# Altium PCB SFCslaver.PcbDoc (part 2 of 6)
Units mm, origin at the board's own origin, x right, y up, seen from the top; angles counter-clockwise.
Board outline 149.66 x 75.74 mm, 2 copper layers (Top Layer, Bottom Layer); 284 components, 212 nets, 830 pads, 310 vias.
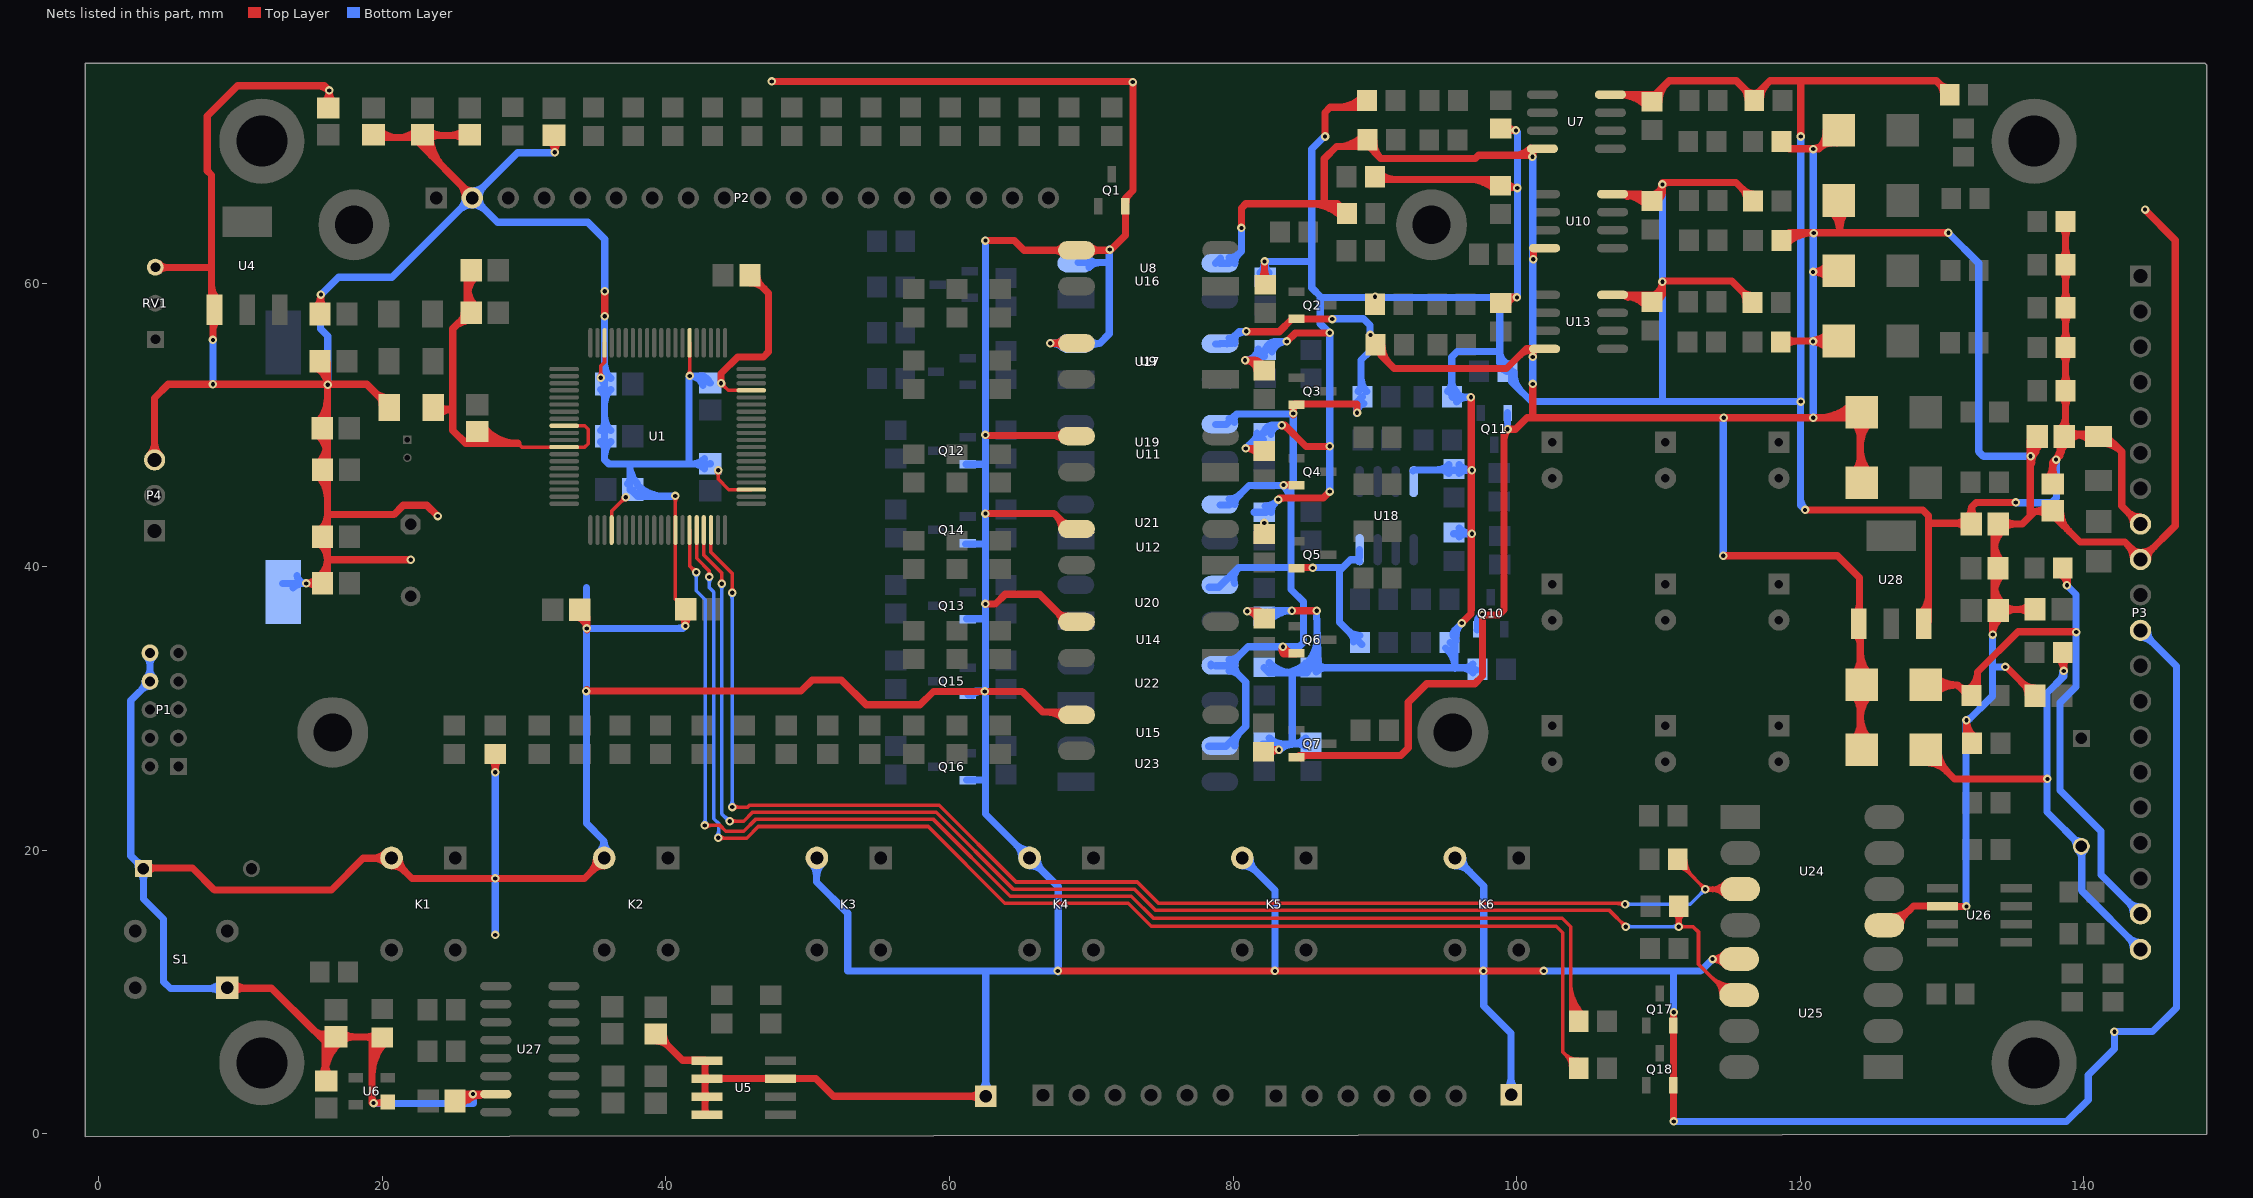
[diagram p2: the nets of this part, all layers, seen from the top]

## Via types
v1: diameter 0.6, hole 0.3, Top Layer to Bottom Layer, 310 vias

## Nets (pads, with @x,y where several pads share a name; then routed paths per layer and width w, separated by ;. In a path a pad name is that pad's centre, name@x,y a point inside that pad or via, vN(x,y) a via of type N, cw(c..) or ccw(c..) an arc to the next point about the centre after c; other vN are vias at no path point) (continued)
12V: C25.2 C28.2 C41.2 F1.2 P3.8 R1.2 R39.2 R44.2 R45.2 R50.1 R51.2 R52.1 R53.1 R59.2 R60.2 R65.2 R66.2 R71.1 R72.2 R73.2 R74.1 R81.2 R82.2 R87.2 R88.2 R93.1 R94.2 R95.1 R96.1 R107.2 R108.2 R112.2 R113.2 R118.1 R119.1 R120.2 R121.2 R126.2 R127.2 R130.2 R133.2 R134.1 R137.2 R138.1 U7.8 U10.8 U13.8 U18.8 U28.3 | length 495.6
  Top Layer w0.508: v1@80.823,54.559 v1(80.848,54.559) ; v1@80.848,54.513 cw(c80.848,53.114) R53.1@81.837,54.104 ; v1@80.975,36.855 v1(81.001,36.855) ; 81.406,54.535 cw(c80.7,53.829) R53.1@81.698,53.829 ; 81.408,54.559 cw(c81.408,53.757) R53.1@82.206,53.835 ; R95.1@81.598,36.855 cw(c81.598,36.24) R95.1@82.206,36.338 ; R53.1@81.7,53.786 ccw(c80.848,53.703) v1(80.848,54.559) ; R95.1@81.704,36.257 ccw(c81.001,36.143) v1(81.001,36.855) ; R73.2@81.783,47.885 ccw(c80.899,47.244) v1(80.899,48.336) 81.89,48.336 R73.2@82.169,48.057 ; R52.1@81.905,60.193 ccw(c81.146,60.952) 82.22,60.952 ; R96.1@81.991,27.051 82.017,27.076 v1(83.236,27.076) ccw(c83.236,26.299) R96.1@82.573,26.706 ; R53.1@82.122,54.274 cw(c82.072,55.25) 81.382,54.559 ; R95.1@82.194,36.328 82.194,36.525 81.864,36.855 v1(81.001,36.855) ; R53.1@82.194,53.829 82.112,53.829 81.382,54.559 ; R52.1@82.22,59.893 v1(82.22,61.519) ; 82.22,60.956 ccw(c83.299,60.956) R52.1@82.536,60.193 ; R96.1@82.509,27.255 ccw(c82.941,27.687) v1@82.941,27.076 ; 82.931,27.079 ccw(c83.027,27.438) v1@83.213,27.116 ; v1(83.185,44.729) 83.287,44.831 86.36,44.831 v1(86.817,45.288) ; v1@83.218,44.697 cw(c83.541,44.373) 83.541,44.831 ; v1@83.439,49.916 cw(c83.439,49.314) 83.864,49.74 ; v1(83.439,49.962) 83.642,49.962 85.141,48.463 v1@86.843,48.463 ; v1(83.795,55.88) 84.379,56.464 v1@86.745,56.464 ; v1(84.15,36.881) v1(85.903,36.881) ; v1(86.487,70.333) 86.487,72.034 86.843,72.39 88.849,72.39 R44.2@89.383,72.923 ; 87.328,72.39 ccw(c87.328,74.944) R44.2@89.134,73.138 ; 88.555,72.39 ccw(c88.555,73.717) R44.2@89.493,72.779 ; R65.2@90.094,67.488 90.272,67.31 98.527,67.31 R71.1@98.63,67.206 ; R65.2@90.317,67.122 cw(c90.77,66.67) 90.77,67.31 ; R65.2@90.317,67.753 ccw(c91.387,68.823) 91.387,67.31 ; v1@96.169,36.047 96.788,36.666 96.788,36.932 96.799,36.944 v1@96.799,51.968 ; 96.649,67.31 cw(c96.649,64.704) R71.1@98.491,66.547 ; 97.875,67.31 cw(c97.875,65.931) R71.1@98.851,66.906 ; R93.1@98.806,58.623 99.187,59.004 v1@100,59.004 ; R71.1@98.933,66.726 v1@100.025,66.726 ; R50.1@98.958,70.764 v1(99.949,70.764) cw(c99.949,71.509) R50.1@99.314,71.12 ; R71.1@99.222,66.547 cw(c99.654,66.115) 99.654,66.726 ; R50.1@99.249,70.571 cw(c99.717,70.104) v1@99.717,70.764 ; R71.1@99.272,67.118 ccw(c100.025,67.645) v1@100.025,66.726 ; R93.1@99.37,58.494 cw(c100,58.361) v1@100,59.004 ; v1(100.025,58.979) v1@100,59.004 ; v1(100.051,66.7) v1@100.025,66.726 ; U7.8@106.606,73.283 109.783,73.283 110.769,74.27 115.491,74.27 116.886,72.875 116.886,73.277 117.879,74.27 129.591,74.27 R1.2@130.581,73.279 ; U13.8@106.77,59.161 110.287,59.161 v1@110.287,60.089 ; U10.8@106.77,66.273 108.759,66.273 ; U7.8@107.207,73.283 cw(c107.207,70.49) R51.2@109.182,72.465 ; U13.8@107.222,59.161 cw(c107.222,56.382) R94.2@109.187,58.347 ; U10.8@107.222,66.273 cw(c107.222,63.494) R72.2@109.187,65.459 ; U13.8@107.61,59.184 ccw(c107.973,59.393) 107.865,58.988 ; U10.8@107.61,66.296 ccw(c107.973,66.505) 107.865,66.1 ; 108.434,73.283 cw(c108.434,71.716) R51.2@109.542,72.824 ; 108.448,59.161 cw(c108.448,57.608) R94.2@109.546,58.706 ; 108.448,66.273 cw(c108.448,64.72) R72.2@109.546,65.818 ; R72.2@109.311,66.177 cw(c109.103,66.617) 108.759,66.273 ; R94.2@109.5,59.096 ccw(c109.267,60.089) v1@110.287,60.089 ; R72.2@109.535,66.215 ccw(c109.401,67.09) v1@110.287,67.09 ; R72.2@109.552,65.774 109.881,66.103 109.944,66.103 110.287,66.446 v1@110.287,67.09 ; R72.2@109.577,65.765 109.56,65.782 109.249,65.782 108.759,66.273 ; R72.2@109.611,65.713 ccw(c109.492,66.499) 110.287,66.499 ; R94.2@109.616,58.602 ccw(c109.418,59.448) 110.287,59.448 ; R72.2@109.944,66.103 ccw(c109.211,66.836) v1@110.241,66.949 ; R51.2@110.044,72.78 cw(c111.887,72.78) 110.584,74.084 ; v1@110.319,66.922 cw(c110.726,66.515) 110.726,67.09 ; 115.861,59.456 cw(c115.082,58.677) R88.2@116.183,58.677 ; 115.885,59.432 ccw(c116.629,60.176) R88.2@116.629,59.123 ; 115.893,66.662 cw(c115.071,65.84) R66.2@116.234,65.84 ; 115.94,73.821 cw(c115.045,72.927) R45.2@116.31,72.927 ; 115.979,66.576 ccw(c116.68,67.277) R66.2@116.68,66.286 ; 116.128,73.633 ccw(c116.756,74.261) 116.756,73.373 ccw(c116.756,73.918) R45.2@117.142,73.533 ; R88.2@116.664,58.653 115.186,60.131 110.245,60.131 v1@110.287,60.089 ; R66.2@116.715,65.841 115.465,67.09 v1@110.287,67.09 ; R45.2@117.202,72.927 cw(c118.81,72.927) 117.673,74.064 ; v1@120.04,70.358 120.04,74.27 ; v1(120.345,43.993) 128.651,43.993 129.057,43.586 129.057,36.119 U28.3@128.88,35.941 ; U28.3@128.506,36.7 ccw(c127.177,38.029) 129.057,38.029 ; 129.184,43.053 C41.2@131.587,43.053 ; 129.759,74.101 ccw(c130.547,74.888) R1.2@130.547,73.775 ; 129.796,74.064 cw(c129.061,73.329) R1.2@130.101,73.329 ; 130.861,43.053 cw(c130.861,41.853) C41.2@131.709,42.701 ; 130.865,43.053 ccw(c130.865,44.248) C41.2@131.709,43.403 ; C41.2@131.623,43.053 C41.2@131.587,43.053 ; C41.2@131.732,43.424 ccw(c131.05,44.196) 132.08,44.196 ; C41.2@132.41,43.404 cw(c133.196,44.196) 132.08,44.196 ; v1@135.255,44.526 132.41,44.526 132.08,44.196 ; C28.2@137.42,46.183 ccw(c136.514,47.089) 137.795,47.089 ; C28.2@137.566,45.441 137.795,45.669 137.795,47.32 138.024,47.549 v1(138.049,47.549) 138.328,47.828 138.328,48.795 C25.2@138.737,49.203 ; 137.795,46.825 cw(c138.773,46.825) v1@138.082,47.516 ; 137.795,46.97 ccw(c138.908,46.97) C28.2@138.121,46.183 ; 137.795,47.207 cw(c138.094,47.207) v1@138.055,47.503 ; v1@138.016,47.581 ccw(c137.263,48.334) 138.328,48.334 ; C25.2@138.269,49.579 ccw(c137.179,50.669) 138.721,50.669 ; 138.328,47.796 cw(c139.354,47.796) C25.2@138.859,48.694 ; R82.2@138.405,52.039 cw(c137.644,51.278) 138.721,51.278 cw(c139.797,51.278) R82.2@139.036,52.039 ; R82.2@138.405,52.77 ccw(c137.644,53.531) 138.721,53.531 ccw(c139.797,53.531) R82.2@139.036,52.77 ; R81.2@138.405,55.087 cw(c137.644,54.326) 138.721,54.326 cw(c139.797,54.326) R81.2@139.036,55.087 ; R81.2@138.405,55.818 ccw(c137.644,56.579) 138.721,56.579 ccw(c139.797,56.579) R81.2@139.036,55.818 ; R60.2@138.405,57.881 cw(c137.644,57.12) 138.721,57.12 cw(c139.797,57.12) R60.2@139.036,57.881 ; R60.2@138.405,58.612 ccw(c137.644,59.373) 138.721,59.373 ccw(c139.797,59.373) R60.2@139.036,58.612 ; R59.2@138.405,60.929 cw(c137.644,60.168) 138.721,60.168 cw(c139.797,60.168) R59.2@139.036,60.929 ; R59.2@138.405,61.66 ccw(c137.644,62.421) 138.721,62.421 ccw(c139.797,62.421) R59.2@139.036,61.66 ; R39.2@138.405,63.977 cw(c137.644,63.216) 138.721,63.216 cw(c139.797,63.216) R39.2@139.036,63.977 ; C25.2@138.721,49.128 R82.2@138.721,52.404 R81.2@138.721,55.452 R60.2@138.721,58.246 R59.2@138.721,61.294 R39.2@138.721,64.342 ; 138.721,50.183 ccw(c139.574,50.183) 138.971,49.579 ccw(c139.519,50.128) 139.519,49.352 ; C25.2@138.735,49.352 141.427,49.352 142.672,48.108 ; C25.2@138.971,48.878 cw(c140.116,47.733) F1.2@140.116,49.352 ; C25.2@139.221,49.352 cw(c139.221,47.55) F1.2@140.495,48.824 ; 139.909,49.297 cw(c140.007,48.931) F1.2@140.37,49.037 ; 140.077,49.352 ccw(c140.077,49.945) F1.2@140.495,49.526 ; F1.2@141.255,48.679 cw(c141.291,46.727) 142.672,48.108 ; 143.058,43.886 ccw(c144,44.829) P3.8@144,43.496 ; 143.193,43.751 cw(c142.442,43) P3.8@143.504,43 ; P3.8@143.942,43.002 142.672,44.272 142.672,48.108 ; v1(80.848,54.559) 81.382,54.559 ; C41.2@131.587,43.053 132.08,43.546 132.08,44.196 ; v1@138.026,47.589 ccw(c137.619,48.294) 138.405,48.083 cw(c137.619,48.294) v1@138.026,47.589
  Bottom Layer w0.508: v1(80.899,48.336) 80.958,48.336 80.958,48.396 81.534,48.971 81.636,48.971 R126.2@82.22,49.555 ; v1@81.101,48.539 cw(c82.144,47.496) R126.2@82.144,48.971 ; 81.446,54.559 ccw(c81.446,55.406) R108.2@82.282,55.27 ; R130.2@81.494,43.829 82.31,43.829 83.21,44.729 v1(83.185,44.729) ; R126.2@81.5,48.937 ccw(c81.02,49.417) R126.2@81.698,49.417 ; R127.2@81.724,36.345 ccw(c81.001,36.087) v1(81.001,36.855) 81.712,36.855 82.169,36.398 82.169,36.678 R127.2@82.28,36.789 ; R108.2@81.778,55.224 cw(c80.985,55.125) 81.55,54.559 ; R108.2@81.78,55.352 cw(c80.848,55.504) v1(80.848,54.559) 81.55,54.559 ; R107.2@81.905,60.726 ccw(c81.146,61.485) v1@82.22,61.485 ; R107.2@82.093,60.096 82.22,60.096 v1(82.22,61.519) 85.547,61.519 ; R137.2@82.133,27.487 cw(c82.133,25.974) v1@83.203,27.044 ; R126.2@82.183,49.428 cw(c82.855,49.305) R126.2@82.855,49.987 ; R133.2@82.194,32.856 82.55,32.5 85.219,32.5 R134.1@85.256,32.537 ; R126.2@82.194,49.417 82.765,49.987 83.464,49.987 ccw(c83.464,49.193) R126.2@82.683,49.336 ; R127.2@82.199,36.537 cw(c82.987,35.807) 82.987,36.881 ; R133.2@82.201,32.859 ccw(c83.065,33.723) 83.065,32.5 ; R108.2@82.218,54.834 ccw(c82.213,53.896) 81.55,54.559 ; v1@82.22,61.489 ccw(c83.299,61.489) R107.2@82.536,60.726 ; R130.2@82.244,44.275 ccw(c82.244,45.509) v1@83.117,44.636 ; R108.2@82.262,55.3 cw(c83.079,55.015) 83.079,55.88 ; R108.2@82.271,55.28 81.55,54.559 ; R108.2@82.275,55.275 82.88,55.88 v1(83.795,55.88) ccw(c83.795,54.765) R108.2@82.742,55.133 ; R137.2@82.432,27.189 cw(c82.722,26.563) v1@83.21,27.051 ; R137.2@82.56,27.278 cw(c83.063,26.775) 83.063,27.487 ; R137.2@82.56,27.909 ccw(c83.579,28.928) 83.579,27.487 ; R133.2@82.56,33.218 ccw(c84.292,34.95) 84.292,32.5 ; R127.2@82.572,36.191 cw(c84.15,34.729) v1(84.15,36.881) ; R130.2@82.69,43.829 cw(c83.61,43.829) 82.96,44.479 ; R127.2@82.931,36.881 v1(84.15,36.881) ; v1(83.236,27.076) v1@83.21,27.051 ; v1@83.268,27.044 cw(c84.338,25.974) 84.338,27.487 ; 83.45,32.5 ccw(c83.45,34.877) R134.1@85.131,33.197 ; 84.112,27.487 ccw(c84.112,28.928) R138.1@85.131,27.909 ; 84.176,32.461 84.176,27.483 ; 84.628,27.487 cw(c84.628,26.775) 85.131,27.278 ccw(c84.638,26.785) 84.638,27.483 ; 84.677,32.5 ccw(c84.677,33.651) R134.1@85.49,32.837 ; R138.1@85.118,27.896 cw(c84.176,28.765) 84.176,27.483 ; R134.1@85.221,33.186 ccw(c83.298,34.992) 85.935,35.075 ; R134.1@85.592,32.839 ccw(c84.562,33.805) 85.973,33.85 ; R134.1@85.598,33.274 R134.1@86.004,32.868 ; R134.1@85.862,32.566 cw(c86.59,31.837) 86.59,32.868 ; R134.1@85.862,33.197 ccw(c86.656,33.991) 86.656,32.868 ; v1@85.877,36.881 R134.1@86.004,32.868 ; 86.157,58.953 86.157,57.125 86.817,56.464 v1(86.817,45.288) ; v1(86.487,70.333) 86.436,70.333 85.547,69.444 85.547,61.519 ; U18.8@92.686,46.74 92.758,46.812 R119.1@95.518,46.812 ; 94.308,46.812 ccw(c94.308,48.094) R119.1@95.215,47.188 ; 94.599,46.812 cw(c94.599,45.941) R119.1@95.215,46.557 ; R112.2@94.979,34.255 cw(c93.806,32.823) 95.656,32.823 ; R113.2@95.124,52.338 ccw(c94.385,53.077) 95.43,53.077 ; R112.2@95.3,34.648 cw(c94.685,33.896) 95.656,33.896 ; R113.2@95.43,52.095 95.43,54.79 95.809,55.169 98.808,55.169 ; 95.43,53.122 ccw(c96.538,53.122) R113.2@95.754,52.338 ; R113.2@95.439,51.973 95.469,51.943 v1(96.774,51.943) ; R119.1@95.529,46.787 v1(96.85,46.787) cw(c96.85,48.006) R119.1@95.957,47.176 ; R118.1@95.555,42.316 v1(96.85,42.316) cw(c96.85,43.536) R118.1@95.957,42.706 ; R112.2@95.617,34.969 cw(c95.962,35.229) 95.656,35.535 ; R112.2@95.704,34.754 cw(c97.217,34.939) v1(96.139,36.017) 95.656,35.535 ; R113.2@95.754,51.607 cw(c96.565,50.797) v1@96.565,51.943 ; R113.2@95.754,52.238 ccw(c96.466,52.95) 96.466,51.943 ; R118.1@95.946,42.087 cw(c96.5,41.532) 96.5,42.316 ; R119.1@95.946,46.557 cw(c96.5,46.002) 96.5,46.787 ; 96.046,32.868 cw(c96.046,31.615) R120.2@96.932,32.501 ; 96.295,32.868 ccw(c96.295,33.768) R120.2@96.932,33.131 ; R120.2@97.155,32.715 97.079,32.715 96.926,32.868 95.656,32.868 ; R121.2@98.808,54.475 ccw(c99.555,54.475) R121.2@99.33,53.763 ; R121.2@98.938,53.995 ccw(c98.379,54.23) 98.808,54.659 ; R121.2@99.483,54.247 cw(c99.774,55.169) 98.808,55.169 ; R121.2@99.795,53.722 ccw(c101.816,53.722) 100.387,52.293 ; v1@99.916,70.732 cw(c99.565,70.38) 100.062,70.38 ; v1@99.924,70.764 100.062,70.626 100.062,58.979 98.808,58.979 ; v1(100.025,58.979) 100,59.004 98.837,59.004 98.808,59.034 98.808,58.979 ; 110.287,51.638 110.287,66.827 110.312,66.853 110.312,67.056 110.287,67.031 v1(110.287,66.954) ; 120.015,44.901 ccw(c121.253,44.901) v1@120.378,44.025 ; v1(120.04,70.333) v1(120.04,51.638) ; v1(120.345,43.993) 120.015,44.323 120.015,51.613 v1(120.04,51.638) ; v1(135.204,44.526) 135.23,44.501 137.719,44.501 138.074,44.856 138.074,47.498 138.024,47.549 v1(138.049,47.549) ; v1@83.21,27.051 82.804,27.457 82.321,27.457 82.194,27.33 82.067,27.33 81.991,27.254 81.928,27.318 82.097,27.487 85.424,27.487 85.42,27.483 84.176,27.483 ; 85.547,61.519 85.547,59.665 86.233,58.979 98.808,58.979 ; R134.1@86.004,32.868 95.656,32.868 ; 95.656,32.868 95.656,35.535 ; 98.808,54.659 98.808,55.169 ; 98.808,54.659 99.644,53.823 99.644,53.035 101.041,51.638 v1(120.04,51.638) ; 98.808,55.169 98.808,58.979
  other v1: 82.194,43.078 86.817,48.489 86.817,56.49 90.018,59.03 110.287,60.096
AGND: C13.1 C17.1 C19.1 LR3.2 U1.9 U1.12 | length 39.6
  Top Layer w0.254: 29.566,48.692 29.829,48.429 34.281,48.429 34.519,48.666 34.519,49.682 34.272,49.929 U1.9@32.823,49.929
  Top Layer w0.508: LR3.2@23.597,51.206 23.699,51.105 24.968,51.105 ; LR3.2@23.948,51.357 ccw(c24.557,51.966) 24.557,51.105 ; LR3.2@23.959,50.667 cw(c24.968,49.723) 24.968,51.105 ; 24.968,51.257 24.968,56.769 25.984,57.785 C13.1@25.984,60.985 ; 25.061,56.861 cw(c26.279,55.643) C17.1@26.279,57.366 ; C17.1@25.586,57.387 ccw(c25.111,57.862) C17.1@25.783,57.862 ; C19.1@25.954,48.863 ccw(c26.319,49.166) 26.319,48.692 ; 25.984,58.951 cw(c28.187,58.951) C13.1@26.63,60.508 ; 25.984,59.871 ccw(c28.187,59.871) C17.1@26.63,58.313 ; C19.1@26.345,49.188 ccw(c27.401,50.064) 27.401,48.692 ; C19.1@26.736,49.512 ccw(c28.483,50.963) 28.483,48.692 ; C19.1@27.127,49.837 ccw(c29.565,51.861) 29.565,48.692 ; 29.566,48.692 25.883,48.692 24.968,49.606 24.968,51.105
CAN_LED_ERR: R160.1 U1.36 | length 100.7
  Top Layer w0.254: U1.36@42.173,42.579 42.173,40.581 43.066,39.688 ; v1@42.937,39.397 ccw(c42.673,39.687) 43.066,39.687 ; v1@43.066,39.256 43.066,39.688 ; 43.066,39.655 ccw(c43.44,39.655) v1@43.175,39.391 ; v1@43.713,20.93 43.806,20.837 45.693,20.837 46.523,21.668 58.495,21.668 63.905,16.258 72.617,16.258 74.24,14.635 102.79,14.635 103.251,14.173 103.251,5.762 R160.1@104.386,4.627 ; v1@43.81,20.756 cw(c44.005,20.562) 44.005,20.837 ; v1@43.81,21.001 ccw(c44.207,21.397) 44.207,20.837 ; 103.323,5.691 ccw(c104.386,6.754) R160.1@104.386,5.25 ; 103.444,5.57 cw(c102.551,4.677) R160.1@103.813,4.677 ; R160.1@103.756,5.257 ccw(c104.386,5.887) R160.1@104.386,4.996
  Bottom Layer w0.254: v1@42.931,39.146 cw(c42.596,38.811) 43.069,38.811 ; 43.069,38.89 cw(c43.431,38.89) v1@43.175,39.146 ; v1@43.069,39.252 43.069,38.515 43.383,38.202 43.383,22.225 43.739,21.869 43.739,20.93 v1(43.688,20.879) ; v1@43.566,21.001 ccw(c43.148,21.419) 43.739,21.419
  other v1: 43.053,39.268
CAN_LED_RUN: R158.1 U1.35 | length 103.4
  Top Layer w0.254: U1.35@41.673,42.579 41.673,40.039 v1@42.1,39.611 ; 41.8,39.912 ccw(c42.139,40.251) v1@42.139,39.772 ; 41.861,39.851 cw(c41.609,39.599) v1@41.966,39.599 ; v1(42.748,21.742) 43.815,21.742 44.221,21.336 45.486,21.336 46.317,22.167 58.87,22.167 64.28,16.757 72.824,16.757 74.387,15.193 103.221,15.193 103.81,14.605 103.81,8.484 R158.1@104.445,7.849 ; v1@42.871,21.62 cw(c43.166,21.325) 43.166,21.742 cw(c43.166,22.16) v1@42.871,21.865 ; 103.81,8.911 ccw(c105.322,8.911) R158.1@104.253,7.841 ; 103.81,9.524 ccw(c105.935,9.524) R158.1@104.432,8.021 ; 103.81,10.137 ccw(c106.549,10.137) R158.1@104.612,8.2 ; 103.81,10.75 ccw(c107.162,10.75) R158.1@104.792,8.38
  Bottom Layer w0.254: v1@42.016,39.476 cw(c41.721,39.181) 42.139,39.181 cw(c42.556,39.181) v1@42.261,39.476 ; v1(42.139,39.599) 42.139,38.303 42.774,37.668 42.774,21.844 42.875,21.742 v1(42.748,21.742) ; v1@42.626,21.865 ccw(c42.269,22.221) 42.774,22.221 ; 42.774,22.099 ccw(c43.105,22.099) v1@42.871,21.865
CAN_RD1: R139.2 U1.37 U25.6 | length 116.3
  Top Layer w0.254: U1.37@42.673,42.579 42.673,40.817 43.942,39.548 v1@43.942,38.71 ; v1@43.82,38.908 ccw(c43.524,39.203) 43.942,39.203 ccw(c44.36,39.203) v1@44.064,38.908 ; v1@44.399,22.123 44.475,22.047 45.491,22.047 46.11,22.666 59.077,22.666 64.487,17.256 73.03,17.256 74.538,15.748 106.553,15.748 v1(107.696,14.605) v1@107.709,14.592 ; v1@44.623,21.925 cw(c44.918,21.63) 44.918,22.047 cw(c44.918,22.465) v1@44.623,22.17 ; v1@107.523,14.605 ccw(c107.105,14.605) 107.401,14.9 ccw(c107.696,15.196) v1@107.696,14.778 ; R139.2@111.034,15.598 cw(c110.079,14.642) v1@111.43,14.642 ; R139.2@111.214,15.777 cw(c110.692,15.255) 111.43,15.255 ; v1@111.28,14.692 ccw(c110.89,14.917) 111.325,15.033 ; v1@111.307,14.727 ccw(c111.012,15.023) 111.43,15.023 ccw(c111.847,15.023) 111.552,14.727 ccw(c111.847,15.023) 111.847,14.605 ccw(c111.847,14.187) v1@111.552,14.483 ; 111.337,14.988 ccw(c111.709,15.088) v1@111.516,14.755 ; v1@111.343,14.755 ccw(c111.134,15.116) 111.538,15.008 ccw(c111.941,14.9) v1@111.58,14.691 ; 111.43,15.215 cw(c112.221,15.215) R139.2@111.664,15.776 ; R139.2@111.43,16.129 v1(111.43,14.605) ; R139.2@111.843,15.596 ccw(c112.825,14.605) v1(111.43,14.605) ; 113.681,11.109 ccw(c115.147,12.575) U25.6@115.147,10.502 ; 114.009,10.781 cw(c113.006,9.779) U25.6@114.424,9.779 ; 114.115,10.676 ccw(c115.147,11.708) U25.6@115.147,10.248 ; 114.442,10.348 cw(c113.874,9.779) U25.6@114.678,9.779 ; U25.6@115.799,9.677 115.113,9.677 112.827,11.963 112.827,14.224 112.446,14.605 v1(111.43,14.605)
  Bottom Layer w0.254: v1@43.82,38.663 cw(c43.524,38.368) 43.942,38.368 cw(c44.36,38.368) v1@44.064,38.663 ; v1(43.942,38.786) 43.942,22.555 44.386,22.111 v1@44.399,22.123 ; 44.119,22.378 ccw(c44.501,22.76) v1@44.501,22.22 ; 44.241,22.256 cw(c44.033,22.047) v1@44.328,22.047 ; v1(107.696,14.605) v1(111.43,14.605) ; v1@107.818,14.483 cw(c108.114,14.187) 108.114,14.605 cw(c108.114,15.023) v1@107.818,14.727 ; v1@111.307,14.483 ccw(c111.012,14.187) 111.012,14.605 ccw(c111.012,15.023) v1@111.307,14.727
  other v1: 44.501,22.047
CAN_TD1: R159.2 U1.38 U24.3 | length 112.3
  Top Layer w0.254: U1.38@43.173,42.579 43.173,41.023 44.679,39.517 v1@44.679,38.1 ; v1@44.556,38.273 ccw(c44.261,38.568) 44.679,38.568 ccw(c45.096,38.568) v1@44.801,38.273 ; v1@44.653,22.962 44.729,23.038 45.771,23.038 45.898,23.165 59.284,23.165 64.694,17.755 73.237,17.755 74.745,16.247 107.578,16.247 v1(107.645,16.18) ; v1@44.801,22.915 cw(c45.096,22.62) 45.096,23.038 cw(c45.096,23.455) v1@44.801,23.16 ; 107.065,16.247 cw(c107.065,15.6) v1@107.523,16.057 ; R159.2@111.354,19.279 111.887,18.745 111.887,18.669 v1(113.309,17.247) U24.3@115.773,17.247 ; R159.2@111.363,18.732 cw(c111.363,17.618) 112.15,18.406 ; R159.2@111.682,19.305 ccw(c112.722,19.305) 111.987,18.569 ; R159.2@111.936,19.305 ccw(c113.589,19.305) 112.42,18.136 ; v1@113.136,17.247 ccw(c112.719,17.247) 113.014,17.542 ccw(c113.309,17.837) v1@113.309,17.42 ; v1@113.396,17.097 cw(c113.68,16.609) 113.825,17.155 ; v1@113.396,17.396 ccw(c113.68,17.884) 113.825,17.339 ; v1@113.432,17.124 cw(c113.727,16.829) 113.727,17.247 cw(c113.727,17.664) v1@113.432,17.369 ; v1@113.459,17.16 cw(c113.693,17.024) 113.624,17.285 ; v1@113.459,17.334 ccw(c113.693,17.469) 113.624,17.208 ; U24.3@114.712,16.735 ccw(c113.478,15.501) 113.478,17.247 ccw(c113.478,18.992) U24.3@114.712,17.758 ; U24.3@114.892,16.915 ccw(c114.091,16.114) 114.091,17.247 ccw(c114.091,18.379) U24.3@114.892,17.578
  Bottom Layer w0.254: v1@44.556,23.16 ccw(c44.289,23.427) 44.667,23.427 ; v1@44.556,38.028 cw(c44.289,37.761) 44.667,37.761 ; 44.667,23.483 ccw(c45.124,23.483) v1@44.801,23.16 ; 44.667,37.705 cw(c45.124,37.705) v1@44.801,38.028 ; v1@44.679,22.962 44.667,22.973 44.667,38.139 v1(44.679,38.151) ; v1(107.645,16.18) 112.243,16.18 v1(113.309,17.247) ; v1@107.768,16.057 cw(c108.063,15.762) 108.063,16.18 cw(c108.063,16.597) v1@107.768,16.302 ; v1@113.136,17.247 cw(c112.719,17.247) 113.014,16.951 cw(c113.309,16.656) v1@113.309,17.074
  other v1: 44.679,23.038
CANH_PORT1: D19.2 P3.19 R146.1 R150.2 | length 50.6
  Top Layer w0.508: D19.2@128.795,31.653 128.799,31.648 131.089,31.648 ; D19.2@129.479,31.019 cw(c130.998,29.5) 130.998,31.648 ; D19.2@129.479,32.286 ccw(c131.019,33.826) 131.019,31.648 ; R150.2@131.834,31.34 ccw(c131.07,32.563) 132.512,32.563 ; R150.2@131.948,30.789 131.089,31.648 ; R150.2@131.97,31.396 cw(c131.757,32.316) 131.089,31.648 ; R150.2@132.103,30.909 ccw(c131.643,31.646) R150.2@132.512,31.646 ; R150.2@132.131,30.886 132.512,31.267 132.512,32.563 ; R146.1@138.333,39.447 cw(c137.978,38.666) v1@138.836,38.666 ; R146.1@138.532,39.853 138.532,39.7 138.836,39.395 138.836,38.71 v1(138.811,38.684) ; v1@139.497,35.408 135.357,35.408 132.512,32.563
  Bottom Layer w0.508: v1@138.811,38.659 139.446,38.024 139.446,31.521 138.328,30.404 138.328,24.232 141.224,21.336 141.224,18.263 P3.19@143.987,15.5 ; 143.13,16.356 ccw(c144,17.226) P3.19@144,15.996 ; 143.163,16.324 cw(c142.339,15.5) P3.19@143.504,15.5
  other v1: 139.471,35.382
CANL_PORT1: D20.2 J2.2 P3.20 R147.1 | length 44
  Top Layer w0.508: D20.2@128.803,27.051 128.854,27.051 130.886,25.019 v1@137.414,25.019 ; D20.2@128.845,26.185 cw(c128.845,24.072) 130.339,25.566 ; D20.2@129.741,27.081 ccw(c131.955,27.081) 130.39,25.516 ; R147.1@138.202,33.573 cw(c137.284,32.655) v1@138.582,32.655 ; v1@138.582,32.614 R147.1@138.582,34.011 ; 138.582,32.969 cw(c139.437,32.969) R147.1@138.833,33.573
  Bottom Layer w0.508: 138.234,31.91 ccw(c137.506,32.639) v1@138.536,32.639 ; v1@138.582,32.563 138.582,32.258 137.414,31.09 137.414,22.682 139.852,20.244 139.852,17.145 P3.20@143.997,13 ; J2.2@139.481,20.269 ccw(c138.646,20.269) 139.236,20.86 ccw(c139.827,21.451) J2.2@139.827,20.615 ; J2.2@139.582,20.025 cw(c138.93,19.373) 139.852,19.373 ; 139.852,19.495 cw(c140.601,19.495) J2.2@140.072,20.025 ; 143.149,13.849 ccw(c144,14.7) P3.20@144,13.496 ; 143.155,13.842 cw(c142.313,13) P3.20@143.504,13
  other v1: 137.439,25.019 138.582,32.639
GND: BT1.2 C1.2 C2.2 C3.2 C4.2 C5.1 C6.1 C7.1 C8.1 C9.1 C10.1 C11.1 C12.1 C14.1 C15.2 C16.1 C18.1 C20.1 C21.1 C22.2 C23.1 C24.2 C27.1 C38.1 GND1.1 GND2.1 J1.1 K1.2 K2.2 K3.2 K4.2 K5.2 K6.2 LR3.1 P1.8 P1.10 P2.2 P3.11 P4.3 Q1.2 Q12.2 Q13.2 Q14.2 Q15.2 Q16.2 Q17.2 Q18.2 R4.2 R155.2 RV1.3 S1.1 U1.24 U1.33 U1.43 U1.57 U1.66 U1.78 U4.1 U5.1 U5.2 U5.3 U5.4 U5.7 U6.1 U8.3 U9.3 U11.3 U12.3 U14.3 U15.3 U16.2 U17.2 U25.5 U27.15 | length 913.2
  Top Layer w0.254: v1@35.285,53.437 ccw(c34.99,53.732) 35.408,53.732 ccw(c35.825,53.732) v1@35.53,53.437 ; v1(35.408,53.315) 35.408,54.153 35.673,54.418 U1.78@35.673,55.779 ; U1.24@36.173,42.579 36.173,43.92 v1@37.16,44.907 ; 36.822,44.569 cw(c37.16,44.23) v1@37.16,44.709 ; 36.883,44.63 ccw(c36.631,44.882) v1@36.987,44.882 ; v1@40.543,44.861 cw(c40.23,44.548) 40.673,44.548 ; 40.673,44.583 cw(c41.066,44.583) v1@40.788,44.861 ; v1@40.673,44.925 40.673,37.712 C9.1@41.377,37.008 ; v1@41.559,53.564 ccw(c41.285,53.838) 41.673,53.838 ; v1@41.673,53.442 U1.66@41.673,55.779 ; 41.673,53.88 ccw(c42.12,53.88) v1@41.804,53.564 ; v1@43.566,46.664 cw(c43.27,46.369) 43.688,46.369 cw(c44.106,46.369) v1@43.81,46.664 ; v1@43.688,46.812 43.688,46.177 44.437,45.429 U1.43@46.023,45.429 ; v1@43.891,52.761 cw(c43.891,52.343) 44.187,52.638 cw(c44.482,52.934) v1@44.064,52.934 ; v1(43.891,52.934) 44.396,52.429 U1.57@46.023,52.429
  Top Layer w0.508: J1.1@3.15,18.745 6.604,18.745 8.153,17.196 16.408,17.196 18.644,19.431 20.669,19.431 22.091,18.009 34.265,18.009 K2.2@35.687,19.431 ; J1.1@3.394,18.45 cw(c4.108,17.736) 4.108,18.745 ; J1.1@3.394,18.939 ccw(c3.862,19.407) 3.862,18.745 ; P4.3@3.586,47.87 ccw(c2.74,48.717) 3.937,48.717 ccw(c5.134,48.717) P4.3@4.288,47.87 ; P4.3@3.937,47.574 3.937,51.892 4.902,52.857 v1(8.052,52.857) v1@16.129,52.857 ; RV1.3@3.962,61.087 7.925,61.087 ; RV1.3@4.232,60.868 cw(c4.762,60.338) 4.762,61.087 ; RV1.3@4.232,61.357 ccw(c4.884,62.009) 4.884,61.087 ; 7.95,59.872 ccw(c9.398,59.872) U4.1@8.374,58.848 ; U4.1@8.038,57.937 8.038,58.114 7.95,58.202 7.95,67.615 7.645,67.92 7.645,71.78 9.779,73.914 15.926,73.914 v1(16.256,73.584) ; v1(8.052,55.982) U4.1@8.052,57.937 ; 8.052,56.602 cw(c9.152,56.602) U4.1@8.374,57.38 ; S1.1@9.042,10.262 12.192,10.262 15.164,7.29 15.179,7.29 ; S1.1@9.453,9.908 cw(c10.308,9.053) 10.308,10.262 ; S1.1@9.453,10.68 ccw(c10.462,11.689) 10.462,10.262 ; v1@14.587,38.837 cw(c14.581,37.633) C2.2@15.436,38.48 ; v1@14.596,38.837 ccw(c14.602,40.028) C2.2@15.44,39.181 ; v1@14.605,38.837 14.631,38.836 15.789,38.831 C2.2@16.17,38.829 ; C16.1@15.264,58.215 ccw(c14.322,59.182) v1(15.672,59.182) C16.1@15.672,57.734 ; 15.348,73.914 cw(c15.348,72.676) v1@16.223,73.551 ; C11.1@15.373,53.998 cw(c14.68,52.726) v1@16.128,52.726 ; C3.2@15.412,49.358 cw(c13.683,47.628) C4.2@16.129,47.628 ; C3.2@15.412,50.159 ccw(c13.683,51.889) 16.129,51.889 ; C4.2@15.438,46.437 cw(c13.769,44.768) 16.129,44.768 ; C4.2@15.438,47.238 ccw(c13.769,48.907) 16.129,48.907 ; C2.2@15.504,39.285 ccw(c14.66,40.488) 16.129,40.488 ; C1.2@15.505,41.645 cw(c14.675,40.451) 16.129,40.451 ; C1.2@15.525,42.572 ccw(c14.843,43.663) 16.129,43.663 ; 15.575,6.894 ccw(c16.166,7.484) C15.2@16.696,6.839 ; C11.1@15.617,54.444 cw(c15.146,53.581) 16.128,53.581 ; C20.1@15.646,3.846 15.951,4.15 15.951,6.518 15.179,7.29 ; C20.1@15.652,4.069 ccw(c14.93,4.791) 15.951,4.791 ; v1@15.672,58.911 ccw(c16.661,58.911) C16.1@15.962,58.211 ; C3.2@15.772,49.717 cw(c14.909,48.854) 16.129,48.854 ; C3.2@15.772,49.8 ccw(c14.909,50.663) 16.129,50.663 ; C4.2@15.797,46.796 cw(c14.996,45.995) 16.129,45.995 ; C4.2@15.797,46.879 ccw(c14.996,47.68) 16.129,47.68 ; C12.1@15.884,72.705 ccw(c15.032,73.584) v1(16.256,73.584) ; C20.1@15.951,4.052 cw(c19.242,4.052) C15.2@17.023,6.482 ; 15.951,5.041 ccw(c17.325,5.041) C20.1@16.354,4.069 ; 15.951,5.203 cw(c18.19,5.203) C15.2@16.681,6.857 ; C15.2@15.951,6.355 cw(c17.139,6.355) C15.2@16.338,7.232 ; C15.2@15.972,6.497 ccw(c16.523,7.049) C15.2@17.019,6.446 ; C12.1@16.042,72.809 ccw(c15.913,73.127) 16.256,73.127 ; v1@16.128,52.806 C11.1@16.128,54.381 ; C2.2@16.129,39.065 16.129,40.488 ; v1@16.256,73.484 ccw(c17.364,73.484) C12.1@16.581,72.7 ; C15.2@16.292,7.145 cw(c15.646,7.629) 15.646,6.822 ; C15.2@16.317,6.52 ccw(c15.646,5.929) 15.646,6.822 ; C15.2@16.374,7.231 cw(c15.809,7.92) 15.179,7.29 ; C12.1@16.46,72.789 cw(c16.638,73.127) 16.256,73.127 ; C15.2@17.139,6.497 cw(c17.925,5.712) 17.925,6.822 ; C15.2@17.139,7.199 ccw(c18.047,8.107) 18.047,6.822 ; 18.804,6.822 cw(c18.804,5.662) R4.2@19.624,6.482 ; 18.922,6.822 ccw(c18.922,7.815) R4.2@19.624,7.113 ; 19.279,2.515 ccw(c19.737,2.515) v1@19.413,2.192 ; 19.279,4.125 cw(c22.613,4.125) R4.2@20.255,6.482 ; 19.279,5.351 cw(c21.386,5.351) R4.2@19.896,6.842 ; 19.286,19.431 ccw(c19.286,20.814) K1.2@20.264,19.836 ; C10.1@19.355,70.333 19.431,70.256 22.987,70.256 23.139,70.409 C24.2@26.213,70.409 ; 19.378,19.431 cw(c19.378,18.178) K1.2@20.264,19.064 ; 19.397,52.358 ccw(c20.497,53.459) LR3.1@20.497,51.902 ; v1@19.632,2.159 ccw(c19.632,2.969) U6.1@20.204,2.396 ; LR3.1@19.756,51.999 cw(c19.163,51.406) LR3.1@20.001,51.406 ; C10.1@19.781,70.099 cw(c20.162,69.718) C10.1@20.162,70.256 ; C10.1@19.781,70.8 ccw(c21.094,72.113) 21.094,70.256 ; U6.1@19.964,2.159 19.279,2.159 19.279,6.822 15.646,6.822 ; LR3.1@20.574,51.181 18.898,52.857 v1@16.129,52.857 ; K1.2@20.65,18.904 cw(c20.65,17.586) 21.582,18.518 cw(c22.514,19.45) K1.2@21.196,19.45 ; 21.121,70.256 ccw(c21.121,72.113) C23.1@22.434,70.8 ; v1(21.996,40.488) 16.129,40.488 ; C23.1@22.053,70.256 cw(c22.053,69.718) C23.1@22.434,70.099 ; C23.1@22.555,69.901 26.236,66.22 P2.2@26.391,66.22 ; C23.1@22.873,70.449 ccw(c24.963,70.449) 23.485,68.971 ; C23.1@23.235,70.099 cw(c23.984,69.35) 23.984,70.409 ; C23.1@23.235,70.8 ccw(c24.18,71.745) 24.18,70.409 ; C23.1@23.381,70.449 ccw(c26.698,70.449) 24.352,68.104 ; v1(23.901,43.561) 23.139,44.323 21.475,44.323 20.815,43.663 16.129,43.663 ; 24.817,70.409 ccw(c24.817,71.745) C24.2@25.761,70.8 ; 25.013,70.409 cw(c25.013,69.35) C24.2@25.761,70.099 ; C21.1@25.122,2.37 cw(c26.146,1.346) v1@26.146,2.794 ; C21.1@25.298,2.794 U27.15@28.004,2.794 ; 25.411,67.045 cw(c24.367,66) P2.2@25.844,66 ; C21.1@25.482,2.011 cw(c27.373,0.12) U27.15@27.373,2.794 ; 25.691,66.765 ccw(c26.34,67.413) P2.2@26.34,66.496 ; 26.06,2.387 ccw(c25.699,2.94) v1@26.346,2.804 ; v1@26.419,2.83 ccw(c26.801,3.318) 26.914,2.709 ; R155.2@27.65,26.472 cw(c26.889,25.711) 27.965,25.711 cw(c29.042,25.711) R155.2@28.281,26.472 ; v1(27.965,25.502) R155.2@27.965,26.788 R155.2@27.965,26.899 ; C22.2@31.807,70.077 cw(c30.962,69.233) v1@32.156,69.233 ; v1@32.156,69.19 C22.2@32.156,70.409 ; v1@32.156,69.228 cw(c33.357,69.228) C22.2@32.508,70.077 ; C18.1@33.773,36.433 cw(c33.501,35.548) v1@34.427,35.548 ; C18.1@33.919,36.957 34.427,36.449 34.427,35.646 v1(34.417,35.636) ; C18.1@33.923,36.918 cw(c33.713,36.236) C18.1@34.427,36.236 ; v1(34.366,31.217) 34.366,31.267 34.417,31.318 34.519,31.217 49.53,31.217 50.317,32.004 52.375,32.004 54.127,30.251 57.924,30.251 58.868,31.195 62.481,31.195 v1@62.484,31.192 ; 34.678,18.422 ccw(c33.651,19.45) K2.2@35.104,19.45 ; 34.814,18.558 cw(c35.65,17.721) K2.2@35.65,18.904 ; v1(35.687,57.658) v1(35.687,59.411) ; C38.1@39.34,6.531 cw(c39.34,5.363) 40.166,6.189 ; C38.1@39.345,7.01 41.173,5.182 42.748,5.182 U5.4@42.748,1.295 ; C38.1@39.836,7.027 ccw(c41.062,7.027) 40.195,6.16 ; C9.1@41.051,36.572 cw(c40.331,35.814) v1(41.377,35.814) ; C9.1@41.427,37.033 41.377,36.982 v1(41.377,35.814) ; C9.1@41.716,36.557 ccw(c42.36,35.814) v1(41.377,35.814) ; U5.2@42.494,3.886 U5.2@42.891,3.886 U5.7@47.752,3.886 ; 42.748,1.803 ccw(c43.348,1.803) U5.4@42.924,1.379 ; 42.748,2.159 cw(c43.348,2.159) U5.3@42.924,2.584 ; 42.748,3.073 ccw(c43.348,3.073) U5.3@42.924,2.649 ; 42.748,3.429 cw(c43.348,3.429) U5.2@42.924,3.854 ; 42.748,4.343 ccw(c43.348,4.343) U5.2@42.924,3.919 ; 42.748,4.699 cw(c43.348,4.699) U5.1@42.924,5.124 ; v1@43.891,52.959 43.891,53.619 45.06,54.788 46.888,54.788 47.244,55.143 47.244,59.284 45.974,60.554 C14.1@45.923,60.554 ; C14.1@45.933,60.008 cw(c45.933,58.591) 46.935,59.593 ; C14.1@46.429,60.504 ccw(c47.408,60.504) 46.716,59.812 ; v1@47.523,74.219 72.949,74.219 72.949,66.523 72.415,65.989 72.415,63.373 71.349,62.306 65.253,62.306 64.567,62.992 v1(62.535,62.992) ; U5.7@48.082,3.886 U5.7@48.091,3.886 50.571,3.886 51.816,2.642 GND1.1@62.56,2.642 ; GND1.1@62.209,2.291 ccw(c61.363,1.444) 61.363,2.642 ccw(c61.363,3.839) GND1.1@62.209,2.992 ; v1(62.537,37.368) 63.248,37.368 63.929,38.049 66.345,38.049 U14.3@68.275,36.119 ; v1@62.562,49.255 66.518,49.255 66.523,49.251 U11.3@68.836,49.251 ; v1@62.594,31.191 65.126,31.191 66.573,29.743 68.047,29.743 68.301,29.489 U15.3@68.908,29.489 ; v1@62.638,43.743 67.382,43.743 U12.3@68.478,42.647 ; 66.866,29.743 cw(c66.866,28.094) U15.3@68.033,29.26 ; v1(67.107,55.753) U9.3@68.961,55.753 ; 67.24,49.251 cw(c67.24,48.13) U11.3@68.033,48.922 ; 67.347,62.306 ccw(c67.347,63.277) U8.3@68.033,62.59 ; v1@67.349,55.753 ccw(c67.349,56.72) U9.3@68.033,56.036 ; v1@67.365,55.753 cw(c67.365,54.808) U9.3@68.033,55.476 ; 67.367,62.306 cw(c67.367,61.364) U8.3@68.033,62.03 ; 67.473,49.251 ccw(c67.473,50.042) U11.3@68.033,49.482 ; 67.521,43.604 cw(c66.565,42.648) U12.3@67.917,42.648 ; 67.615,36.779 ccw(c68.313,37.478) U14.3@68.313,36.49 ; v1(67.64,11.481) v1(82.956,11.481) v1(97.663,11.481) v1(101.905,11.481) ; 67.646,36.748 cw(c66.992,36.094) U14.3@67.917,36.094 ; 67.917,43.208 ccw(c68.313,43.605) U12.3@68.313,43.044 ; U8.3@69.893,62.03 cw(c70.559,61.364) 70.559,62.306 ; U8.3@69.893,62.59 ccw(c70.579,63.277) 70.579,62.306 ; Q1.2@72.446,65.698 cw(c73.224,65.698) 72.674,66.248 ; v1(111.074,0.864) v1(111.074,8.56) ; U25.5@114.702,11.922 ccw(c113.817,11.134) v1(113.817,12.319) ; U25.5@114.702,12.716 cw(c113.817,13.504) v1(113.817,12.319) ; U25.5@115.697,12.319 v1(113.817,12.319) ; 16.129,40.488 16.129,43.663 ; 16.129,43.663 v1@16.129,52.857 ; 16.256,73.127 v1(16.256,73.584)
  Bottom Layer w0.508: 2.541,19.328 cw(c1.907,18.694) J1.1@2.804,18.694 ; J1.1@2.602,19.267 ccw(c3.15,19.814) J1.1@3.15,19.04 ; J1.1@2.905,18.45 cw(c2.314,17.859) 3.15,17.859 cw(c3.985,17.859) J1.1@3.394,18.45 ; 3.021,31.317 cw(c3.613,30.724) P1.8@3.613,31.562 ; 3.023,31.319 ccw(c2.434,31.908) P1.8@3.267,31.908 ; J1.1@3.15,18.669 J1.1@3.15,18.72 ; P1.8@3.369,32.153 ccw(c2.794,32.727) 3.607,32.727 ; P1.10@3.369,33.663 cw(c2.794,33.089) 3.607,33.089 ; 3.607,32.759 ccw(c4.465,32.759) P1.8@3.858,32.153 ; 3.607,33.057 cw(c4.465,33.057) P1.10@3.858,33.663 ; P1.10@3.607,33.985 3.607,31.902 2.261,30.556 2.261,19.609 J1.1@3.15,18.72 ; 7.61,10.236 ccw(c7.61,11.75) S1.1@8.681,10.68 ; 7.887,10.236 cw(c7.887,9.114) S1.1@8.681,9.908 ; v1(8.052,52.857) v1(8.052,55.982) ; S1.1@9.093,10.236 5.055,10.236 4.572,10.719 4.572,15.138 3.15,16.561 J1.1@3.15,18.72 ; BT1.2@12.979,38.811 v1(14.63,38.811) cw(c14.63,39.467) BT1.2@13.983,39.361 ; BT1.2@13.704,38.496 cw(c14.466,37.734) v1@14.466,38.811 ; v1@16.154,52.857 16.154,56.261 15.646,56.769 15.646,59.131 16.916,60.401 20.676,60.401 26.289,66.015 P2.2@26.355,66.015 ; v1@19.355,2.134 26.416,2.134 v1@26.416,2.794 ; K1.2@20.599,19.736 20.879,19.456 K1.2@20.879,19.736 ; 25.381,65.107 cw(c26.34,64.148) 26.34,65.504 cw(c26.34,64.149) 27.298,65.107 ; 25.54,65.265 ccw(c24.805,66) P2.2@25.844,66 ; P2.2@26.34,66 P2.2@26.355,66.015 ; P2.2@26.34,66.496 ccw(c26.34,67.693) 27.187,66.847 ccw(c28.033,66) 26.836,66 ccw(c27.876,66) 27.141,65.265 ; v1(27.965,14.021) v1(27.965,18.009) v1(27.965,25.502) v1@27.965,25.527 ; v1@32.156,69.19 29.53,69.19 P2.2@26.355,66.015 ; 34.392,38.506 34.392,21.895 35.636,20.65 ; v1@34.671,35.636 41.199,35.636 v1(41.377,35.814) ; K2.2@35.283,19.855 ccw(c34.563,20.65) 35.636,20.65 ; C7.1@35.375,53.282 cw(c34.647,52.554) C7.1@35.677,52.554 ; C7.1@35.375,53.347 ccw(c34.647,54.076) 35.677,54.076 ; C27.1@35.402,48.799 cw(c34.74,48.136) 35.677,48.136 ; C27.1@35.402,49.601 ccw(c34.74,50.263) 35.677,50.263 ; C7.1@35.402,52.482 cw(c34.74,51.819) 35.677,51.819 ; C7.1@35.402,53.284 ccw(c34.74,53.946) 35.677,53.946 ; K2.2@35.636,19.38 35.636,20.65 ; 35.677,47.768 cw(c37.134,47.768) C27.1@36.104,48.799 ; 35.677,50.631 ccw(c37.134,50.631) C27.1@36.104,49.601 ; 35.677,51.451 cw(c37.134,51.451) C7.1@36.104,52.482 ; 35.677,54.314 ccw(c37.134,54.314) C7.1@36.104,53.284 ; v1@35.677,57.633 35.677,47.534 35.966,47.244 37.465,47.244 ; v1(35.687,59.411) 35.687,63.094 34.493,64.287 28.118,64.287 26.391,66.015 P2.2@26.355,66.015 ; K2.2@36.001,19.868 cw(c36.657,20.65) 35.636,20.65 ; C5.1@37.302,45.841 ccw(c36.909,46.234) C5.1@37.465,46.234 ; C5.1@37.465,45.415 37.465,47.244 ; 37.465,47.142 ccw(c39.304,47.142) C5.1@38.004,45.841 ; C5.1@37.526,45.441 38.009,44.958 v1@40.615,44.958 ; C5.1@37.645,45.382 ccw(c38.668,46.406) 38.668,44.958 ; C5.1@38.004,45.741 ccw(c39.895,47.632) 39.895,44.958 ; 40.836,35.636 ccw(c40.836,36.354) v1@41.344,35.847 ; 41.631,47.244 41.631,53.365 v1@41.707,53.442 ; 41.857,47.244 ccw(c41.857,48.476) C8.1@42.728,47.605 ; 41.906,47.244 cw(c41.906,46.081) C8.1@42.728,46.903 ; C6.1@42.408,53.442 cw(c42.408,52.724) C6.1@43.091,52.948 ; C6.1@42.608,52.789 ccw(c41.707,52.493) v1@41.707,53.442 ; C8.1@43.129,47.254 43.119,47.244 37.465,47.244 ; C6.1@43.129,52.944 42.631,53.442 v1@41.707,53.442 ; K3.2@50.264,19.064 cw(c49.399,18.199) 50.622,18.199 ; 50.622,18.065 cw(c52.035,18.065) K3.2@51.036,19.064 ; K3.2@50.622,19.431 50.622,17.755 52.832,15.545 52.832,11.481 62.56,11.481 ; Q14.2@61.148,41.599 62.501,41.599 ; Q12.2@61.174,47.213 62.46,47.213 ; Q13.2@61.199,36.316 62.537,36.316 ; Q16.2@61.224,24.944 62.514,24.944 ; Q15.2@61.299,30.964 61.596,30.964 61.849,31.217 v1@62.509,31.217 ; Q15.2@61.607,30.931 cw(c62.296,30.242) v1@62.296,31.217 ; GND1.1@62.209,2.992 ccw(c61.363,3.839) 62.56,3.839 ccw(c63.758,3.839) GND1.1@62.911,2.992 ; v1@62.535,63.017 v1(62.537,49.28) v1(62.537,43.743) v1(62.537,37.368) 62.537,36.316 ; GND1.1@62.56,2.642 62.56,11.481 ; 64.701,20.389 ccw(c65.65,21.338) K4.2@65.65,19.996 ; 64.725,20.365 cw(c63.81,19.45) K4.2@65.104,19.45 ; K4.2@65.65,18.904 cw(c65.65,17.61) 66.565,18.525 ; K4.2@66.196,19.45 ccw(c67.538,19.45) 66.589,18.501 ; v1@67.13,55.793 ccw(c67.322,56.126) 67.422,55.754 ; v1@67.132,55.778 67.187,55.723 U17.2@68.912,55.723 70.582,55.723 71.272,56.413 71.272,61.443 ; v1(67.64,11.481) 62.56,11.481 ; v1@67.666,11.43 67.666,17.424 62.535,22.555 62.535,24.031 62.537,24.033 62.537,36.316 ; U17.2@67.982,55.443 ccw(c67.306,54.767) 67.306,55.723 ccw(c67.306,56.679) U17.2@67.982,56.003 ; U16.2@69.063,61.443 71.272,61.443 ; U17.2@69.842,55.443 cw(c70.518,54.767) 70.518,55.723 cw(c70.518,56.679) U17.2@69.842,56.003 ; U16.2@69.842,61.116 cw(c70.631,60.327) 70.631,61.443 ; U16.2@69.842,61.676 ccw(c70.406,62.24) 70.406,61.443 ; v1@71.272,62.382 71.272,61.443 ; K5.2@80.65,18.904 cw(c80.65,17.521) 81.628,18.499 ; K5.2@80.95,19.558 80.95,19.177 82.956,17.17 v1@82.956,11.455 ; K5.2@81.196,19.45 ccw(c82.449,19.45) 81.563,18.564 ; K6.2@95.65,18.904 cw(c95.65,17.432) 96.691,18.473 ; K6.2@95.961,19.583 95.733,19.583 95.656,19.507 97.688,17.475 97.688,9.017 99.593,7.112 GND2.1@99.593,2.718 ; K6.2@96.196,19.45 ccw(c97.361,19.45) 96.537,18.626 ; GND2.1@99.268,3.094 ccw(c98.483,3.879) 99.593,3.879 ; 99.593,4.002 ccw(c100.878,4.002) GND2.1@99.97,3.094 ; v1(101.905,11.481) 112.979,11.481 v1@113.792,12.294 ; v1(111.074,0.864) 138.786,0.864 140.31,2.388 140.31,4.14 142.164,5.994 142.164,7.214 144.856,7.214 146.533,8.89 146.533,32.969 143.993,35.509 P3.11@143.967,35.509 ; v1(111.074,8.56) 111.074,11.481 ; P3.11@144,35.004 cw(c144,33.802) 144.85,34.652 ; P3.11@144.496,35.5 ccw(c145.689,35.5) 144.845,34.656
  other v1: 19.38,2.159 26.391,2.794 142.164,7.188 62.484,31.191 37.16,44.882 40.665,44.983 43.688,46.787 16.154,52.832 41.681,53.442 71.298,62.357 32.156,69.215 72.923,74.168 47.473,74.219
GNDA: C25.1 C28.1 C34.1 C35.1 C41.1 C42.1 C43.1 D4.1 D5.1 D7.1 D8.1 D11.1 D12.1 D19.1 D20.1 P3.9 Q2.2 Q3.2 Q4.2 Q5.2 Q6.2 Q7.2 Q10.2 Q11.2 R42.1 R43.1 R63.1 R64.1 R85.1 R86.1 R110.1 R111.1 R145.1 U7.4 U10.4 U13.4 U16.3 U17.3 U18.4 U19.3 U20.3 U21.3 U22.3 U23.3 U24.5 U26.2 U28.1 | length 523.8
  Top Layer w0.508: v1(80.594,63.881) 80.594,65.278 80.899,65.583 87.376,65.583 R63.1@88.036,64.922 ; v1(80.924,56.591) 80.95,56.566 83.261,56.566 84.165,57.47 v1@87.031,57.47 ; v1(83.515,34.341) 83.515,33.884 83.536,33.884 83.561,33.858 ; v1@83.542,45.747 Q4.2@84.473,45.747 ; v1@83.549,34.31 ccw(c83.794,34.09) 83.561,33.858 ; v1@83.555,34.364 ccw(c84.428,34.865) Q6.2@84.428,33.858 ; Q5.2@84.226,39.903 Q5.2@84.22,39.897 ; v1@84.252,50.698 Q3.2@84.252,51.384 ; Q3.2@84.353,51.46 88.748,51.46 v1(88.748,50.851) ; Q6.2@84.473,33.903 Q6.2@84.428,33.858 ; Q7.2@84.529,26.543 84.656,26.67 91.821,26.67 92.354,27.203 92.354,30.429 93.663,31.737 97.041,31.737 97.587,32.283 97.587,36.576 98.755,36.576 99.111,36.932 99.111,49.454 99.339,49.682 v1(99.365,49.682) 99.924,49.682 100.736,50.495 123.837,50.495 D11.1@123.837,51.244 ; Q7.2@84.781,26.512 cw(c85.163,26.129) 85.163,26.67 ; 85.415,65.583 cw(c85.415,62.335) R63.1@87.712,64.632 ; v1@85.674,39.929 84.504,39.929 Q5.2@84.473,39.897 Q5.2@84.22,39.897 ; 86.436,65.659 86.436,68.758 87.3,69.621 89.002,69.621 R42.1@89.51,70.129 ; 86.642,65.583 cw(c86.642,63.562) R63.1@88.071,64.991 ; 87.354,69.621 ccw(c87.354,72.175) R42.1@89.159,70.369 ; 88.58,69.621 ccw(c88.58,70.949) R42.1@89.519,70.01 ; R42.1@89.475,70.104 89.475,69.732 90.424,68.783 ; R42.1@89.921,70.043 ccw(c91.64,70) 90.424,68.783 ; R85.1@90.429,55.352 ccw(c90.751,55.136) 90.477,54.862 ; R85.1@90.477,55.071 90.477,54.862 ; R85.1@90.505,55.601 ccw(c92.358,55.601) 91.048,54.291 ; 98.4,69.012 97.307,69.012 97.079,68.783 90.424,68.783 ; 98.403,69.012 101.143,69.012 101.143,69.452 101.122,69.473 U7.4@101.122,69.448 ; 99.111,48.958 cw(c100.089,48.958) v1@99.397,49.65 ; 99.111,49.341 cw(c99.409,49.341) v1@99.371,49.637 ; 99.793,69.012 ccw(c99.793,70.698) U7.4@100.985,69.506 ; 100.234,54.917 cw(c101.17,53.981) U13.4@101.17,55.305 ; 100.761,69.012 cw(c100.761,68.554) v1@101.085,68.878 ; U7.4@100.985,69.441 cw(c100.606,69.061) v1@101.143,69.061 ; v1(101.143,54.788) 101.143,55.374 101.145,55.376 100.694,55.376 99.292,53.975 91.364,53.975 90.477,54.862 ; 101.145,50.495 v1@101.145,52.908 ; v1@101.194,61.646 101.194,62.433 101.223,62.463 U10.4@101.97,62.463 ; v1@114.554,40.767 122.631,40.767 124.181,39.218 124.181,35.941 U28.1@124.13,35.89 ; R86.1@118.629,55.833 118.701,55.905 122.809,55.905 122.809,56.794 D8.1@122.603,56.794 ; R64.1@118.636,63.09 cw(c119.749,61.978) 119.749,63.551 ; R64.1@118.68,62.996 119.235,63.551 v1@130.378,63.551 ; R43.1@118.694,69.977 119.202,69.469 121.31,69.469 ; R86.1@118.945,55.568 cw(c119.759,54.754) 119.759,55.905 ; R86.1@118.945,56.199 ccw(c119.653,56.907) 119.653,55.905 ; R64.1@118.995,62.731 cw(c120.975,60.751) v1@120.975,63.551 ; 120.547,55.905 ccw(c120.547,58.083) D8.1@122.086,56.543 ; 120.567,55.905 cw(c120.567,53.757) D8.1@122.086,55.276 ; v1@120.929,69.49 ccw(c120.929,70.459) D4.1@121.615,69.774 ; 121.252,50.495 ccw(c121.252,53.973) D11.1@123.712,51.514 ; D4.1@121.824,70.749 cw(c120.07,70.71) 121.31,69.469 ; D7.1@121.972,61.357 cw(c120.904,62.063) v1(120.904,60.782) ; D7.1@122.05,60.267 ccw(c120.904,59.249) v1(120.904,60.782) ; D5.1@122.107,65.162 cw(c120.598,63.549) 122.807,63.549 ; 122.479,50.495 ccw(c122.479,52.747) D11.1@124.071,51.155 ; D4.1@122.517,70.396 122.238,70.396 121.31,69.469 ; D4.1@122.581,69.883 ccw(c122.353,68.426) 121.31,69.469 ; D7.1@122.733,60.782 v1(120.904,60.782) ; 122.807,63.551 D5.1@122.807,64.668 ; 122.807,63.862 cw(c124.673,63.862) D5.1@123.353,65.182 ; 123.112,50.495 cw(c123.112,49.647) D11.1@123.712,50.247 ; D20.1@123.712,27.714 ccw(c122.457,28.969) 124.231,28.969 ; D19.1@123.712,31.019 cw(c122.457,29.765) 124.231,29.765 ; D19.1@123.712,32.286 ccw(c122.457,33.541) 124.231,33.541 ; D12.1@123.711,46.535 ccw(c122.448,47.797) 124.234,47.798 ; D11.1@123.712,50.246 cw(c122.456,48.989) 124.233,48.99 ; U28.1@123.906,35.231 cw(c123.122,34.447) 124.231,34.447 ; U28.1@123.906,36.7 ccw(c123.245,37.361) 124.181,37.361 ; 124.181,37.048 ccw(c124.674,37.048) U28.1@124.325,36.7 ; 124.231,28.293 ccw(c125.557,28.293) D20.1@124.62,27.355 ; 124.231,29.214 cw(c126.784,29.214) D19.1@124.979,31.019 ; 124.231,29.519 ccw(c126.784,29.519) D20.1@124.979,27.714 ; 124.231,30.441 cw(c125.557,30.441) D19.1@124.62,31.378 ; 124.231,32.865 ccw(c125.557,32.865) D19.1@124.62,31.927 ; 124.231,34.091 ccw(c126.784,34.091) D19.1@124.979,32.286 ; U28.1@124.231,35.941 124.231,27.144 D20.1@124.295,27.081 ; D11.1@124.232,50.8 D12.1@124.235,45.97 ; 124.234,48.332 ccw(c126.774,48.333) D12.1@124.979,46.536 ; 124.234,48.444 cw(c126.783,48.445) D11.1@124.979,50.247 ; 124.233,49.671 cw(c125.556,49.671) D11.1@124.62,50.606 ; 124.234,47.105 ccw(c125.548,47.106) D12.1@124.62,46.177 ; U24.5@125.933,14.707 126.644,14.707 127.991,16.053 U26.2@130.023,16.053 ; U24.5@126.483,15.303 ccw(c126.483,17.131) 127.776,15.838 ; U24.5@127.079,14.707 cw(c128.129,14.707) 127.387,15.449 ; 131.14,16.027 v1@131.699,16.027 ; R145.1@131.724,28.21 ccw(c132.539,28.21) R145.1@132.087,27.532 ; R145.1@132.131,27.381 131.724,27.788 v1(131.724,29.159) ccw(c133.172,29.159) R145.1@132.369,27.955 ; v1@133.554,35.153 cw(c135.104,35.153) C43.1@134.245,36.443 ; v1@133.554,35.204 C43.1@133.554,36.83 ; 133.554,36.102 cw(c134.472,36.102) C43.1@133.963,36.866 ; C43.1@133.629,36.982 C34.1@135.89,36.982 ; C43.1@133.665,36.906 C41.1@133.665,43.002 ; C43.1@133.665,37.663 ccw(c134.677,37.663) C43.1@133.961,36.948 ; 133.665,37.956 cw(c135.816,37.956) C42.1@134.295,39.477 ; 133.665,38.89 ccw(c135.903,38.89) 134.321,37.307 ccw(c135.104,38.09) 135.104,36.982 ; 133.665,41.042 cw(c135.87,41.042) C41.1@134.311,42.601 ; 133.665,41.8 ccw(c135.816,41.8) C42.1@134.295,40.279 ; C41.1@133.96,43.002 135.661,43.002 136.55,43.891 ; C41.1@134.311,42.651 cw(c135.158,41.805) 135.158,43.002 cw(c135.158,44.2) C41.1@134.311,43.353 ; C43.1@134.321,36.605 cw(c135.23,35.696) 135.23,36.982 ; v1@134.468,32.944 134.514,32.944 C35.1@136.567,30.891 ; 135.36,36.982 ccw(c135.36,38.194) C34.1@136.217,37.337 ; 135.38,36.982 cw(c135.38,35.799) C34.1@136.217,36.636 ; 135.635,31.823 ccw(c136.567,32.755) C35.1@136.567,31.437 ; 135.756,31.702 cw(c134.995,30.941) C35.1@136.071,30.941 ; v1@136.208,47.751 cw(c135.641,47.363) 136.316,47.237 ; 136.22,43.561 136.22,48.868 C25.1@136.628,49.276 ; 136.22,46.725 cw(c139.123,46.725) C25.1@137.071,48.778 ; v1@136.22,47.951 cw(c137.897,47.951) C25.1@136.711,49.137 ; v1@136.236,47.822 ccw(c136.111,48.414) 136.618,48.084 ; C34.1@136.576,36.957 C34.1@136.627,37.008 ; 136.671,43.891 cw(c136.671,42.832) C28.1@137.42,43.581 ; C28.1@137.405,44.267 cw(c136.55,45.05) 136.55,43.891 ; C28.1@138.366,43.932 ccw(c140.396,43.932) 138.961,42.497 ; 143.06,41.573 cw(c141.986,40.5) P3.9@143.504,40.5 ; 143.38,41.253 ccw(c144,41.873) 144,40.996 ccw(c144,42.389) 144.985,41.404 ; v1@144.31,65.164 146.456,63.017 146.456,42.875 144.5,40.919 P3.9@144.5,40.5 ; P3.9@144.496,40.5 cw(c145.497,40.5) 144.789,41.208 ; P3.9@144.514,40.5 144.476,40.462 144.17,40.462 142.9,41.732 139.725,41.732 137.566,43.891 136.55,43.891 ; 83.561,33.858 Q6.2@84.428,33.858 ; Q5.2@84.22,39.897 84.201,39.878 84.201,39.897 Q5.2@84.22,39.897
  Bottom Layer w0.508: U23.3@78.285,27.335 79.506,27.335 80.899,28.727 80.899,31.852 U22.3@79.705,33.045 ; U20.3@78.31,38.536 78.996,38.536 80.389,39.929 ; U22.3@78.454,33.007 U22.3@78.454,33.117 ; U23.3@78.742,27.309 U23.3@78.767,27.335 ; U22.3@78.767,33.007 79.718,33.007 81.051,34.341 84.658,34.341 84.963,34.646 84.963,37.516 84.09,38.388 84.09,39.929 ; U19.3@78.767,50.025 79.515,50.025 80.25,50.761 ; U17.3@78.767,55.698 U17.3@79.072,55.698 ; U16.3@78.767,61.396 U16.3@79.121,61.75 ; U17.3@79.072,55.723 U17.3@79.913,55.723 ; U16.3@79.072,61.396 79.76,61.396 80.594,62.23 v1@80.594,63.856 ; U21.3@79.097,44.353 79.76,44.353 81.132,45.724 84.09,45.724 ; U17.3@79.574,55.698 U17.3@79.599,55.723 ; U17.3@79.574,55.723 80.416,56.566 ; U22.3@79.722,32.637 cw(c79.722,31.69) 80.391,32.36 ; U22.3@79.722,33.429 ccw(c79.722,34.436) 80.434,33.724 ; U21.3@79.722,44.774 ccw(c79.722,45.884) 80.507,45.099 ; U19.3@79.722,50.447 ccw(c79.722,50.963) 80.087,50.598 ; U17.3@79.722,56.119 ccw(c79.722,56.718) 80.145,56.295 ; U16.3@79.722,61.792 ccw(c79.722,62.84) 80.463,62.099 ; U17.3@80.022,56.171 cw(c80.924,55.269) v1@80.924,56.545 ; U19.3@80.101,50.166 cw(c80.672,50.339) 80.25,50.761 ; U20.3@80.102,38.816 cw(c81.187,39.13) 80.389,39.929 ; U17.3@80.117,55.754 cw(c81.147,55.835) 80.416,56.566 ; U23.3@80.118,27.36 cw(c81.534,27.36) 80.533,28.361 ; U21.3@80.118,44.378 cw(c80.92,44.378) 80.353,44.945 ; U16.3@80.118,61.396 cw(c80.982,61.396) 80.371,62.007 ; 80.383,33.672 ccw(c81.023,33.033) 80.118,33.033 ccw(c81.084,33.033) 80.401,32.35 ; v1@80.95,56.566 80.416,56.566 ; v1@83.533,45.713 cw(c82.189,44.368) 84.09,44.368 ; 84.09,45.736 84.09,45.724 ; v1@84.226,50.698 84.164,50.761 80.25,50.761 ; v1(84.252,50.8) 84.252,45.724 84.09,45.724 ; v1(86.995,57.455) 87.02,57.48 89.205,57.48 89.662,57.023 89.662,55.194 89.029,54.561 R111.1@89.029,52.481 ; 87.757,39.929 84.09,39.929 ; 88.069,35.508 ccw(c88.943,36.382) R110.1@88.943,35.146 ; 88.229,35.349 cw(c87.58,34.7) R110.1@88.497,34.7 ; 88.582,40.488 cw(c88.582,40.045) U18.4@88.895,40.358 ; v1@88.722,50.803 cw(c89.441,50.803) R111.1@89.243,51.494 ; v1@88.722,50.876 88.722,51.574 R111.1@89.121,51.973 ; R111.1@88.806,52.338 ccw(c88.267,52.877) 89.029,52.877 ; U18.4@88.927,41.191 88.927,40.644 88.771,40.488 88.29,40.488 87.503,39.7 87.503,36.074 R110.1@89.075,34.502 ; 89.029,53.322 ccw(c90.42,53.322) R111.1@89.436,52.338 ; Q10.2@97.206,35.535 97.231,35.56 97.231,36.271 v1@97.561,36.601 ; Q10.2@97.231,35.632 cw(c98.556,35.632) v1@97.619,36.569 ; Q10.2@97.231,36.116 cw(c97.679,36.116) v1@97.595,36.556 ; Q10.2@97.267,35.855 cw(c98.274,35.889) v1@97.561,36.601 ; v1(97.587,36.601) v1@97.561,36.601 ; v1(99.365,49.682) Q11.2@99.365,50.851 ; v1(101.143,52.883) 101.145,52.885 v1@101.145,68.91 ; v1(114.579,40.767) v1@114.579,50.47 ; v1@120.924,50.552 v1@120.924,69.444 ; v1@130.454,63.525 132.59,61.39 132.59,48.106 132.918,47.777 v1@136.271,47.777 ; v1@131.699,16.027 131.699,29.007 133.553,30.861 v1@133.553,35.204 ; v1@131.724,29.205 ccw(c131.724,29.623) 132.02,29.328 ; 133.553,32.918 v1(134.468,32.918) ; 80.389,39.929 84.09,39.929 ; 84.09,39.929 84.09,45.724
  other v1: 131.724,16.027 133.579,35.204 85.623,39.903 83.566,45.745 136.246,47.777 114.605,50.495 120.929,50.495 120.904,55.88 89.687,56.337 101.168,61.671 120.955,63.525 130.454,63.551 144.323,65.176 101.117,68.91 120.929,69.444